# EAGLE board ELYOS_board (EAGLE 9.6.2)
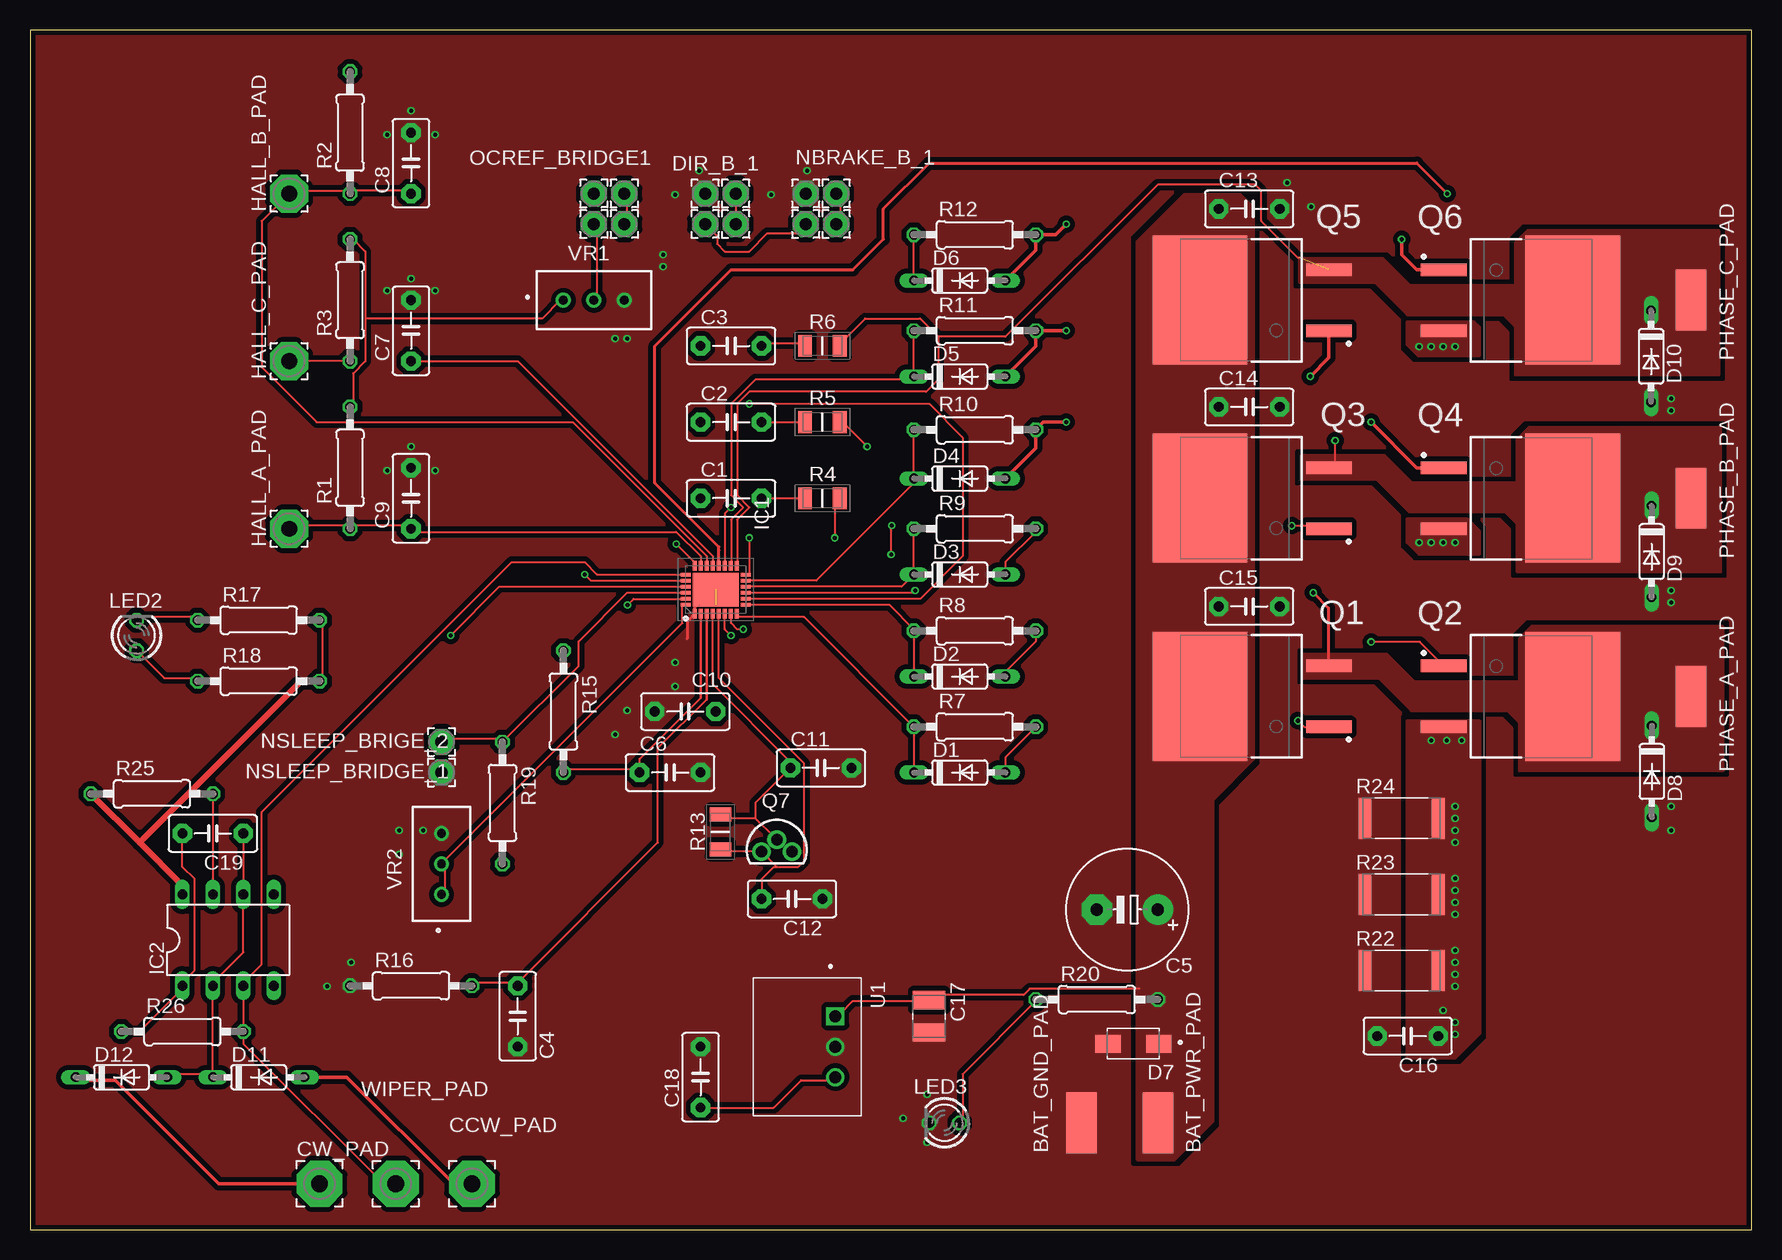
[diagram p0: board, top side]
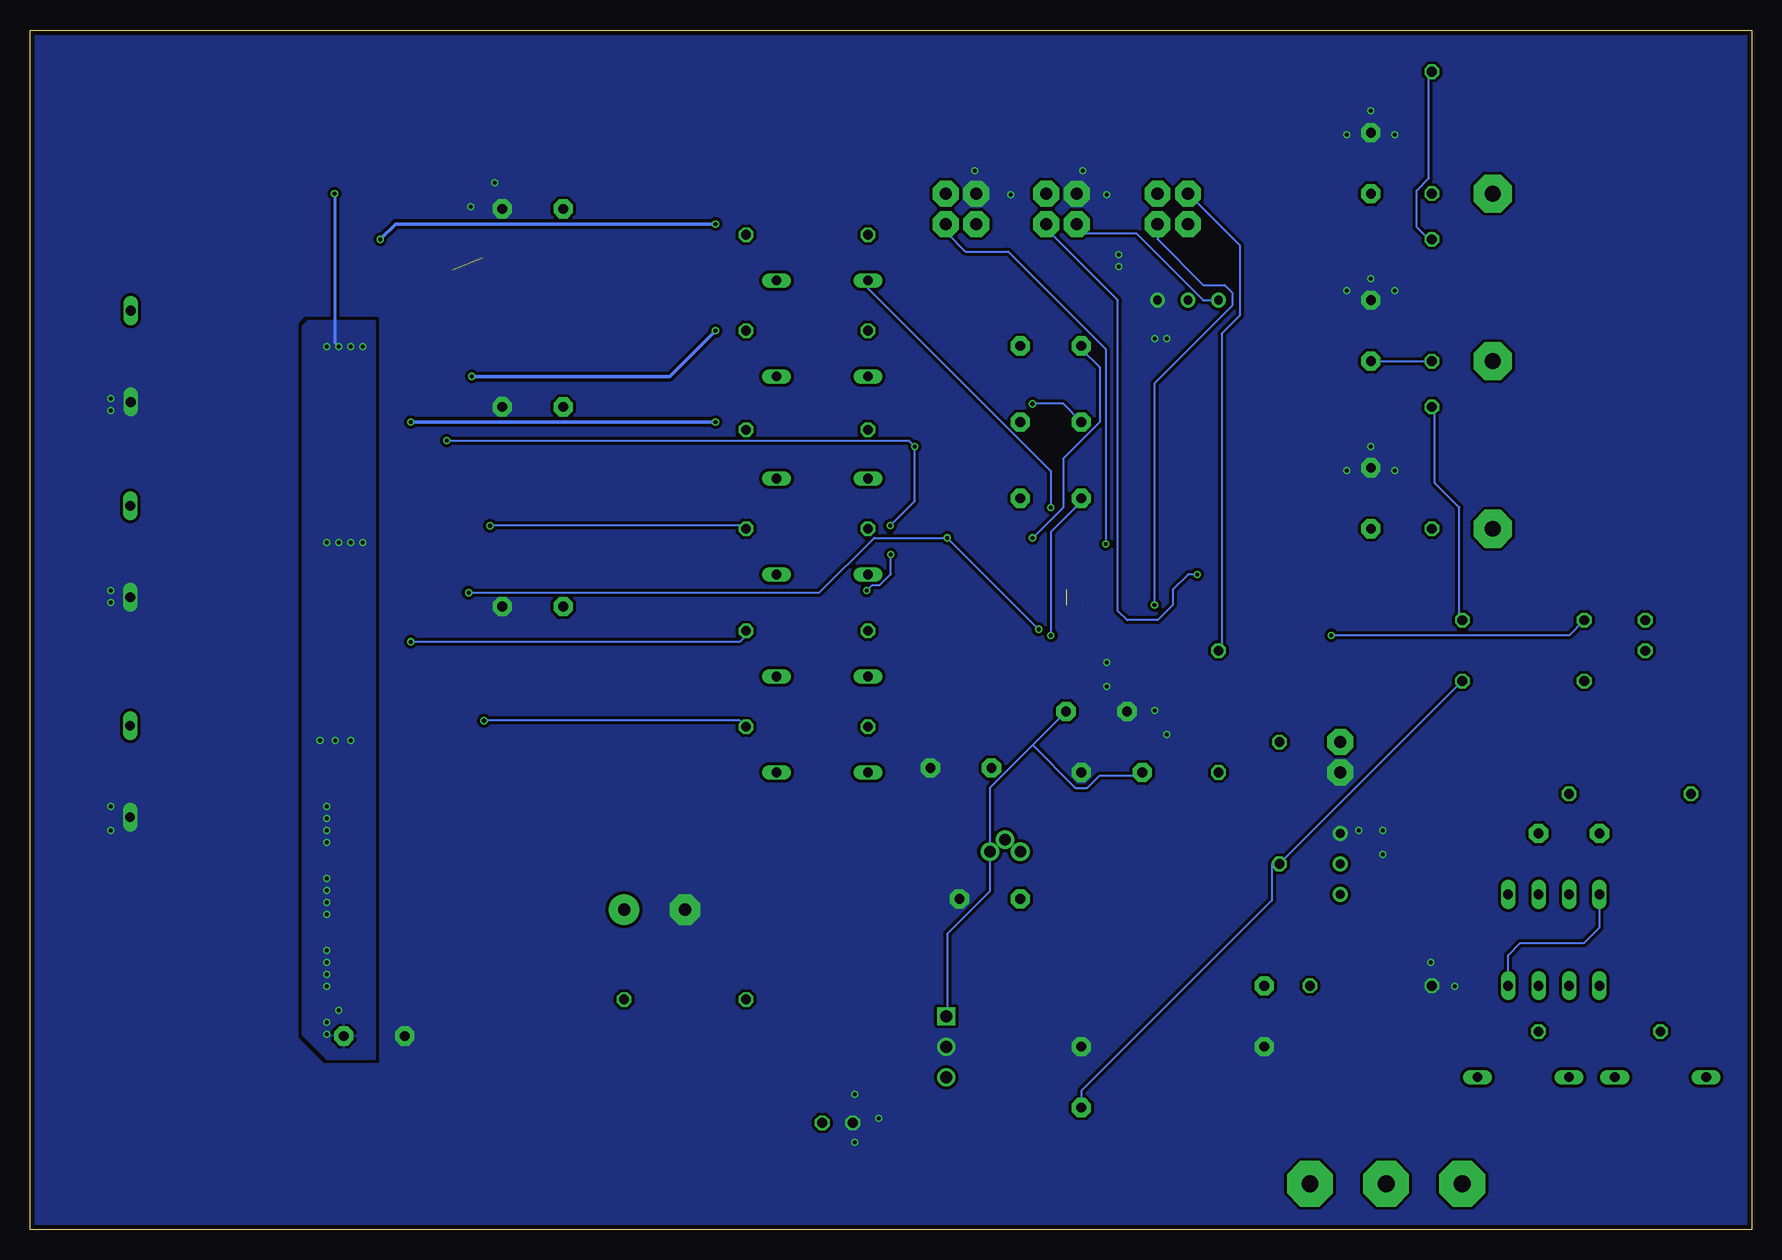
[diagram p1: board, bottom side, seen from below]

Size 143.49 x 100 mm. Coordinates in mm from the lower left corner, seen from the top.
Outline: 0,0 143.49,0 143.49,100 0,100 0,0
Copper layers (1*16): Top 0.035mm / dielectric 1.5mm / Bottom 0.035mm
Design rules "default *": minimum track width 6mil, minimum drill 10mil, track to track 5mil, track to pad 6mil, pad to pad 6mil, via to via 6mil, smd to smd 6mil, copper to edge 15mil, drill to drill 6mil, minimum pad ring 5mil, minimum via ring 5mil, stop-mask expansion 2.5mil, vias tented up to drill 25mil, thermal gap 10mil
Net classes: 0 default: clearance 0.205 mm

## Footprints (pad centres in the part's own frame; a part is rotated, then mirrored left to right if it is on the bottom)
SMD2,54-5,08 = smd 2.54 x 5.08: 1 0,0
C5B3 = drill 0.813 pad 1.6 octagon: 1 -2.54,0; 2 2.54,0
E5-10,5 = drill 1.016 pad 2.54: + -2.54,0 | drill 1.016 pad 2.54 octagon: - 2.54,0
CAPC3225X270N = smd 1.53 x 2.72: 1 -1.341,0; 2 1.341,0
3,81/1,4 = drill 1.397 pad 3.81 octagon: 1 0,0
DO35-7 = drill 0.813 long: A 3.81,0; C -3.81,0
DIOM4325X250N = smd 2.12 x 1.5: A 2.115,0; C -2.115,0
2,15/1,0 = drill 1.016 pad 2.159 octagon: 1 0,0
3,17/1,3 = drill 1.321 pad 3.175 octagon: 1 0,0
QFN50P400X500X100-29N = smd 0.8 x 0.3: 1 -2,1.75; 2 -2,1.25; 3 -2,0.75; 4 -2,0.25; 5 -2,-0.25; 6 -2,-0.75; 7 -2,-1.25; 8 -2,-1.75; 15 2,-1.75; 16 2,-1.25; 17 2,-0.75; 18 2,-0.25; 19 2,0.25; 20 2,0.75; 21 2,1.25; 22 2,1.75 | smd 0.3 x 0.8: 9 -1.25,-2.5; 10 -0.75,-2.5; 11 -0.25,-2.5; 12 0.25,-2.5; 13 0.75,-2.5; 14 1.25,-2.5; 23 1.25,2.5; 24 0.75,2.5; 25 0.25,2.5; 26 -0.25,2.5; 27 -0.75,2.5; 28 -1.25,2.5 | smd 2.8 x 3.8: 29 0,0
DIL-08 = drill 0.813 long: 1 -3.81,-3.81; 2 -1.27,-3.81; 3 1.27,-3.81; 4 3.81,-3.81; 5 3.81,3.81; 6 1.27,3.81; 7 -1.27,3.81; 8 -3.81,3.81
LED3MM = drill 0.813 octagon: A -1.27,0; K 1.27,0
TO254P1524X508-4_3N = smd 3.8 x 1.05: 1 -5.375,2.54; 3 -5.375,-2.54 | smd 7.9 x 10.75: 2 5.375,0
TO-92_FAIRCHILD = drill 0.96 pad 1.56: 1 -1.27,-0.5; 2 0,0.5; 3 1.27,-0.5
0207/10 = drill 0.813 octagon: 1 -5.08,0; 2 5.08,0
RESC3216X65N = smd 1.15 x 1.8: 1 -1.45,0; 2 1.45,0
RESC6332X65N = smd 1.07 x 3.42: 1 -3.055,0; 2 3.055,0
CONV_P7803-500 = drill 1 square: 1 -2.54,2.35 | drill 1: 2 0,2.35; 3 2.54,2.35
3296W-1 = drill 0.74 pad 1.24: 1 -2.54,0; 2 0,0; 3 2.54,0

## Placement (x,y rotation side)
BAT_GND_PAD  [SMD2,54-5,08]  87.63,8.89 0 top
BAT_PWR_PAD  [SMD2,54-5,08]  93.98,8.89 0 top
C1  1uF  [C5B3]  58.42,60.96 0 top
C2  1uF  [C5B3]  58.42,67.31 0 top
C3  1uF  [C5B3]  58.42,73.66 0 top
C4  12nF  [C5B3]  40.64,17.78 270 top
C5  100uF 100v  [E5-10,5]  91.44,26.67 180 top
C6  1uF 100v  [C5B3]  53.34,38.1 0 top
C7  1nF  [C5B3]  31.75,74.93 90 top
C8  1nF  [C5B3]  31.75,88.9 90 top
C9  1nF  [C5B3]  31.75,60.96 90 top
C10  100nF 100v  [C5B3]  54.61,43.18 180 top
C11  1uF 25v  [C5B3]  65.91,38.48 0 top
C12  10uF 25v  [C5B3]  63.5,27.56 180 top
C13  1uF 90v  [C5B3]  101.6,85.09 0 top
C14  1uF 90v  [C5B3]  101.6,68.58 0 top
C15  1uF 90v  [C5B3]  101.6,51.94 0 top
C16  12nF 50v  [C5B3]  114.81,16.13 180 top
C17  GRM32EC72A106KE05K  [CAPC3225X270N]  74.93,17.78 90 top
C18  22uF 10v  [C5B3]  55.88,12.7 90 top
C19  1uF 25v  [C5B3]  15.24,33.02 180 top
CCW_PAD  [3,81/1,4]  36.83,3.81 0 top
CW_PAD  [3,81/1,4]  24.13,3.81 0 top
D1  1N4148DO35-7  [DO35-7]  77.47,38.1 0 top
D2  1N4148DO35-7  [DO35-7]  77.47,46.1 0 top
D3  1N4148DO35-7  [DO35-7]  77.47,54.61 0 top
D4  1N4148DO35-7  [DO35-7]  77.47,62.61 0 top
D5  1N4148DO35-7  [DO35-7]  77.47,71.12 0 top
D6  1N4148DO35-7  [DO35-7]  77.47,79.12 0 top
D7  SMAJ100A  [DIOM4325X250N]  91.95,15.49 180 top
D8  1N4148DO35-7  [DO35-7]  135.15,38.19 270 top
D9  1N4148DO35-7  [DO35-7]  135.13,56.52 270 top
D10  1N4148DO35-7  [DO35-7]  135.08,72.8 270 top
D11  1N4148DO35-7  [DO35-7]  19.05,12.7 0 top
D12  1N4148DO35-7  [DO35-7]  7.62,12.7 0 top
DIR_B_1  [2,15/1,0]  58.8,83.82 0 top
DIR_B_2  [2,15/1,0]  58.8,86.36 0 top
DIR_B_3  [2,15/1,0]  56.26,83.82 0 top
DIR_B_4  [2,15/1,0]  56.26,86.36 0 top
HALL_A_PAD  [3,17/1,3]  21.59,58.42 90 top
HALL_B_PAD  [3,17/1,3]  21.59,86.36 90 top
HALL_C_PAD  [3,17/1,3]  21.59,72.39 90 top
IC1  MP6538GV-Z  [QFN50P400X500X100-29N]  57.15,53.34 90 top
IC2  NE555  [DIL-08]  16.51,24.13 0 top
LED2  TLLG4400  [LED3MM]  8.89,49.53 90 top
LED3  TLLG4400  [LED3MM]  76.2,8.89 180 top
NBRAKE_B_1  [2,15/1,0]  67.18,83.82 0 top
NBRAKE_B_2  [2,15/1,0]  67.18,86.36 0 top
NBRAKE_B_3  [2,15/1,0]  64.64,83.82 0 top
NBRAKE_B_4  [2,15/1,0]  64.64,86.36 0 top
NSLEEP_BRIDGE_1  [2,15/1,0]  34.29,40.64 0 top
NSLEEP_BRIGE_2  [2,15/1,0]  34.29,38.1 0 top
OCREF_BRIDGE1  [2,15/1,0]  46.99,83.82 0 top
OCREF_BRIDGE2  [2,15/1,0]  46.99,86.36 0 top
OCREF_BRIDGE3  [2,15/1,0]  49.53,86.36 0 top
OCREF_BRIDGE4  [2,15/1,0]  49.53,83.82 0 top
PHASE_A_PAD  [SMD2,54-5,08]  138.43,44.45 0 top
PHASE_B_PAD  [SMD2,54-5,08]  138.43,60.96 0 top
PHASE_C_PAD  [SMD2,54-5,08]  138.43,77.47 0 top
Q1  [TO254P1524X508-4_3N]  102.87,44.45 180 top
Q2  [TO254P1524X508-4_3N]  123.19,44.45 0 top
Q3  [TO254P1524X508-4_3N]  102.87,60.96 180 top
Q4  [TO254P1524X508-4_3N]  123.19,60.96 0 top
Q5  [TO254P1524X508-4_3N]  102.87,77.47 180 top
Q6  [TO254P1524X508-4_3N]  123.19,77.47 0 top
Q7  PN2222ABU  [TO-92_FAIRCHILD]  62.23,32 0 top
R1  4.7k  [0207/10]  26.67,63.5 90 top
R2  4.7k  [0207/10]  26.67,91.44 90 top
R3  4.7k  [0207/10]  26.67,77.47 90 top
R4  ESR18EZPJ472  [RESC3216X65N]  66.04,60.96 0 top
R5  ESR18EZPJ472  [RESC3216X65N]  66.04,67.31 0 top
R6  ESR18EZPJ472  [RESC3216X65N]  66.04,73.66 0 top
R7  22  [0207/10]  78.74,41.91 0 top
R8  22  [0207/10]  78.74,49.91 0 top
R9  22  [0207/10]  78.74,58.42 0 top
R10  22  [0207/10]  78.74,66.67 0 top
R11  22  [0207/10]  78.74,74.93 0 top
R12  22  [0207/10]  78.74,82.93 0 top
R13  ESR18EZPJ472  [RESC3216X65N]  57.53,33.15 270 top
R15  100k  [0207/10]  44.45,43.18 270 top
R16  4.7k  [0207/10]  31.75,20.32 0 top
R17  4.7k  [0207/10]  19.05,50.8 0 top
R18  1k  [0207/10]  19.05,45.72 0 top
R19  4.7k  [0207/10]  39.37,35.56 270 top
R20  10k  [0207/10]  88.9,19.18 0 top
R22  CRGCQ2512J330R  [RESC6332X65N]  114.3,21.59 0 top
R23  CRGCQ2512J330R  [RESC6332X65N]  114.3,27.94 0 top
R24  CRGCQ2512J330R  [RESC6332X65N]  114.3,34.29 0 top
R25  1k  [0207/10]  10.16,36.32 0 top
R26  100  [0207/10]  12.7,16.51 0 top
U1  P7803-500  [CONV_P7803-500]  64.77,15.24 270 top
VR1  3296W-1-504LF  [3296W-1]  46.99,77.47 0 top
VR2  3296W-1-504LF  [3296W-1]  34.29,30.48 90 top
WIPER_PAD  [3,81/1,4]  30.48,3.81 0 top

## Library data of the parts
BAT_GND_PAD BAT_PWR_PAD CCW_PAD CW_PAD DIR_B_1-DIR_B_4 HALL_A_PAD HALL_B_PAD HALL_C_PAD NBRAKE_B_1-NBRAKE_B_4 NSLEEP_BRIDGE_1 NSLEEP_BRIGE_2 OCREF_BRIDGE1-OCREF_BRIDGE4 PHASE_A_PAD PHASE_B_PAD PHASE_C_PAD WIPER_PAD = wirepad
C1-C4 C6-C16 C18 C19 = capacitor-wima
C5 = rcl; SPICEPREFIX: C
C17 = GRM32EC72A106KE05K; AVAILABILITY: In Stock; DESCRIPTION: SMD capacitor X7S(EIA) with capacitance 10uF Tol.10%. Rated voltage 100Vdc 125C; MF: Murata Electronics; MP: GRM32EC72A106KE05K; PACKAGE: 3225 Murata; PRICE: None; PURCHASE-URL: https://pricing.snapeda.com/search?q=GRM32EC72A106KE05K&ref=eda
D1-D6 D8-D12 = diode
D7 = SMAJ100A; DESCRIPTION: 162V Clamp 2.5A Ipp Tvs Diode Surface Mount DO-214AC (SMA); DIGI-KEY_PART_NUMBER: SMAJ100ABTR-ND; MF: Bourns; MP: SMAJ100A; PACKAGE: DO-214 Bourns; PURCHASE-URL: https://pricing.snapeda.com/search?q=SMAJ100A&ref=eda
IC1 = MP6538GV-Z; DESCRIPTION: Motor / Motion / Ignition Controllers & Drivers 100V, Three-Phase BLDC Motor Pre-Driver; HEIGHT: 1mm; MANUFACTURER_NAME: Monolithic Power Systems (MPS); MANUFACTURER_PART_NUMBER: MP6538GV-Z; MOUSER_PART_NUMBER: 946-MP6538GV-Z; MOUSER_PRICE-STOCK: https://www.mouser.com/Search/Refine.aspx?Keyword=946-MP6538GV-Z
IC2 = st-microelectronics; MF: Arrow Electronics; MPN: NE555N; OC_FARNELL: 1467742; OC_NEWARK: 89K1486
LED2 LED3 = led; MF: VISHAY SEMICONDUCTOR; OC_FARNELL: 1612435
Q1-Q6 = IRF135S203
Q7 = PN2222ABU; ARROW_PART_NUMBER: PN2222ABU; ARROW_PRICE-STOCK: https://www.arrow.com/en/products/pn2222abu/on-semiconductor?region=nac; DESCRIPTION: Transistor GP BJT NPN 40V 1A TO92 3 Pin; HEIGHT: mm; MANUFACTURER_NAME: onsemi; MANUFACTURER_PART_NUMBER: PN2222ABU; MOUSER_PART_NUMBER: 512-PN2222ABU; MOUSER_PRICE-STOCK: https://www.mouser.co.uk/ProductDetail/onsemi-Fairchild/PN2222ABU?qs=UMEuL5FsraBJOIjLOc%2FtCA%3D%3D
R1-R3 R7-R12 R15-R20 R25 R26 = rcl; SPICEPREFIX: R
R4-R6 R13 = ESR18EZPJ472; DESCRIPTION: Thick Film Resistors - SMD 1206 4K7ohm 5% Anti Surge AEC-Q200; HEIGHT: 0.65mm; MANUFACTURER_NAME: ROHM Semiconductor; MANUFACTURER_PART_NUMBER: ESR18EZPJ472; MOUSER_PART_NUMBER: 755-ESR18EZPJ472; MOUSER_PRICE-STOCK: https://www.mouser.co.uk/ProductDetail/ROHM-Semiconductor/ESR18EZPJ472?qs=DyUWGjl%252BcVslx58QF7i4lw%3D%3D
R22-R24 = CRGCQ2512J330R; COMMENT: 1-2176350-6; DESCRIPTION: Fixed Resistor CRGCQ 2512 330R 5%; DIGI-KEY_PART_NUMBER: A130303TR-ND; MF: TE Connectivity; MP: CRGCQ2512J330R; PACKAGE: 6332 TE Connectivity; PURCHASE-URL: https://pricing.snapeda.com/search?q=CRGCQ2512J330R&ref=eda
U1 = P7803-500; MANUFACTURER: CUI Inc; MAXIMUM_PACKAGE_HEIGHT: 17.5mm; PARTREV: 1.0; SNAPEDA_PN: P7803-500; STANDARD: Manufacturer Recommendations
VR1 VR2 = 3296W-1-504LF; ARROW_PART_NUMBER: 3296W-1-504LF; ARROW_PRICE-STOCK: https://www.arrow.com/en/products/3296w-1-504lf/bourns?region=nac; DESCRIPTION: 500k Through Hole Trimmer Potentiometer 0.5W Top Adjust Bourns 3296 Series; HEIGHT: mm; MANUFACTURER_NAME: Bourns; MANUFACTURER_PART_NUMBER: 3296W-1-504LF; MOUSER_PART_NUMBER: 652-3296W-1-504LF; MOUSER_PRICE-STOCK: https://www.mouser.co.uk/ProductDetail/Bourns/3296W-1-504LF?qs=w1MTx8k0aB61GtweoJ9x6g%3D%3D

## Nets
+3V3: C18.1 DIR_B_3.1 IC2.4 IC2.8 NBRAKE_B_3.1 R1.2 R2.2 R3.2 R17.2 R18.2 R19.2 R25.1 U1.3 VR1.1
BSTA: C1.1 IC1.6
BSTB: C2.1 IC1.10
BSTC: C3.1 IC1.14
CSO: C4.1 IC1.3 R16.2
DIR: DIR_B_1.1 DIR_B_2.1 IC1.24
DT: IC1.28 VR2.1 VR2.2
FAULT: IC1.25 LED2.K R17.1
GHA: D1.C IC1.8 R7.1
GHB: D3.C IC1.12 R9.1
GHC: D5.C IC1.16 R11.1
GLA: D2.C IC1.9 R8.1
GLB: D4.C IC1.13 R10.1
GLC: D6.C IC1.17 R12.1
GND: BAT_GND_PAD.1 C4.2 C5.- C6.2 C7.2 C8.2 C9.2 C10.2 C11.2 C12.1 C13.2 C14.2 C15.2 C16.2 C17.1 C18.2 D7.A D8.A D9.A D10.A DIR_B_4.1 IC1.1 IC1.29 LED3.K NBRAKE_B_4.1 NSLEEP_BRIGE_2.1 R16.1 R22.1 R23.1 R24.1 U1.2 VR1.3 VR2.3
HALL_A: C9.1 HALL_A_PAD.1 IC1.21 R1.1
HALL_B: C8.1 HALL_B_PAD.1 IC1.20 R2.1
HALL_C: C7.1 HALL_C_PAD.1 IC1.19 R3.1
LDO: C11.1 IC1.4 Q7.2 R13.1
LSS: C16.1 IC1.18 Q2.3 Q4.3 Q6.3 R22.2 R23.2 R24.2
N$2: C1.2 R4.1
N$3: C2.2 R5.1
N$4: C19.1 D11.C D12.A IC2.2 IC2.6
N$5: C3.2 R6.1
N$7: CCW_PAD.1 D11.A
N$8: D1.A Q1.1 R7.2
N$10: D6.A Q6.1 R12.2
N$11: OCREF_BRIDGE1.1 VR1.2
N$12: D2.A Q2.1 R8.2
N$13: D3.A Q3.1 R9.2
N$14: D4.A Q4.1 R10.2
N$15: D5.A Q5.1 R11.2
N$18: OCREF_BRIDGE2.1 R15.1
N$19: LED2.A R18.1
N$21: LED3.A R20.1
N$22: CW_PAD.1 D12.C
N$23: C19.2 IC2.1 R26.1
N$24: IC2.7 R25.2
NBRAKE: IC1.22 NBRAKE_B_1.1 NBRAKE_B_2.1
OCREF: IC1.27 OCREF_BRIDGE3.1 OCREF_BRIDGE4.1
PHASEA: D8.C IC1.7 PHASE_A_PAD.1 Q1.3 Q2.2 R4.2
PHASEB: D9.C IC1.11 PHASE_B_PAD.1 Q3.3 Q4.2 R5.2
PHASEC: D10.C IC1.15 PHASE_C_PAD.1 Q5.3 Q6.2 R6.2
PWM: IC1.23 IC2.3 R26.2 WIPER_PAD.1
SLEEP: IC1.26 NSLEEP_BRIDGE_1.1 R19.1
VCC: BAT_PWR_PAD.1 C5.+ C6.1 C10.1 C13.1 C14.1 C15.1 C17.2 D7.C IC1.2 Q1.2 Q3.2 Q5.2 Q7.3 R15.2 R20.2 U1.1
VREG: C12.2 IC1.5 Q7.1 R13.2

## Tracks (layer width: path | path; a pad name or v marks a point on that pad's centre or on a via)
+3V3
  Top 0.152: 27.94,75.95 27.94,81.53 26.92,82.55 R3.2 | 27.94,75.95 27.94,72.39 26.92,71.37 26.92,68.83 R1.2 | NBRAKE_B_3.1 63.88,83.06 61.45,83.06 59.93,81.53 57.91,81.53 57.26,82.19 57.26,82.82 DIR_B_3.1 | 27.94,75.95 42.67,75.95 44.2,77.47 VR1.1 | IC2.8 12.7,28.7 | C18.1 61.98,10.16 64.26,12.45 67.06,12.45 U1.3 | R17.2 24.38,50.55 24.38,45.97 R18.2 23.88,45.47 22.35,45.47
  Top 0.508: 12.7,28.7 9.14,32.26 | 9.14,32.26 R25.1 | 22.35,45.47 9.14,32.26
  Bottom 0.152: R2.2 26.92,96.27 26.92,87.63 27.94,86.61 27.94,83.57 26.92,82.55 R3.2 | VR1.1 45.72,77.47 51.31,83.06 55.5,83.06 DIR_B_3.1 | IC2.4 20.32,22.86 19.3,23.88 13.97,23.88 12.7,25.15 IC2.8 | R18.2 R19.2 40,30.48 40,27.43 55.88,11.56 C18.1 | R1.2 26.42,68.33 26.42,62.23 24.38,60.2 24.38,51.05 R17.2
BSTA  (via drill 0.35)
  Top 0.152: v58.42,49.53 57.91,50.04 57.91,51.05 IC1.6
  Bottom 0.152: v58.42,49.53 58.42,58.17 55.88,60.71 C1.1
BSTB  (via drill 0.35)
  Top 0.152: v59.94,68.83 74.93,68.83 77.72,66.04 77.72,56.13 74.17,52.58 59.94,52.58 IC1.10
  Bottom 0.152: v59.94,68.83 57.4,68.83 C2.1
BSTC  (via drill 0.35)
  Top 0.152: v59.94,57.66 59.94,54.61 IC1.14
  Bottom 0.152: v59.94,57.66 57.4,60.2 57.4,64.26 54.36,67.31 54.36,71.88 55.88,73.41 C3.1
CSO
  Top 0.152: 56.39,44.2 52.32,40.13 52.32,32.26 40.64,20.57 | 56.39,51.05 IC1.3 | 40.64,20.57 37.08,20.57 R16.2 | 40.64,20.57 C4.1
  Top 0.203: 56.39,44.2 56.39,51.05
DIR  (via drill 0.35)
  Top 0.152: v46.23,54.61 46.74,54.1 54.36,54.1 IC1.24 | DIR_B_2.1 DIR_B_1.1
  Bottom 0.152: DIR_B_1.1 58.8,83.44 52.83,77.47 52.83,51.56 52.07,50.8 49.53,50.8 48.26,52.07 48.26,53.34 46.99,54.61 v46.23,54.61
DT
  Top 0.152: IC1.28 54.36,52.07 54.36,50.55 VR2.2 34.54,30.23 34.54,28.19 VR2.1
FAULT  (via drill 0.35)
  Top 0.152: v35.05,49.53 39.12,53.59 54.36,53.59 IC1.25 | LED2.K 9.14,51.05 13.72,51.05 R17.1
  Bottom 0.152: v35.05,49.53 15.24,49.53 R17.1
GHA
  Top 0.152: IC1.8 58.93,51.05 64.52,51.05 R7.1 D1.C
GHB
  Top 0.152: IC1.12 59.94,53.59 72.64,53.59 D3.C R9.1
GHC
  Top 0.152: IC1.16 58.42,55.63 58.42,59.18 59.44,60.2 58.42,61.21 58.42,68.83 60.45,70.87 73.66,70.87 D5.C R11.1
GLA
  Top 0.152: IC1.9 59.94,52.07 71.63,52.07 73.66,50.04 R8.1 D2.C
GLB
  Top 0.152: IC1.13 59.94,54.1 65.53,54.1 73.66,62.23 D4.C R10.1
GLC  (via drill 0.35)
  Top 0.152: v58.42,60.2 57.91,59.69 57.91,55.63 IC1.17 | D6.C R12.1
  Bottom 0.152: v58.42,60.2 58.42,63.25 73.66,78.49 D6.C
GND  (via drill 0.35)  (2 unrouted)
  Top 0.152: 55.76,52.07 57.15,52.07
  Top 0.254: 55.76,52.07 55.61,52.07 55.4,51.86 IC1.1 54.76,50.7 54.76,49.27
  other vias: 48.76,41.27 49.76,43.27 53.76,45.27 53.76,47.27 136.76,35.27 136.76,33.27 136.76,52.27 136.76,53.27 136.76,68.27 136.76,69.27 74.76,11.27 72.76,9.27 74.76,7.27 32.76,33.27 30.76,33.27 30.76,31.27 26.76,22.27 24.76,20.27 33.76,63.27 31.76,65.27 29.76,63.27 33.76,78.27 31.76,79.27 29.76,78.27 33.76,91.27 29.76,91.27 31.76,93.27 49.76,74.27 48.76,74.27 52.76,80.27 52.76,81.27 53.76,86.27 55.76,88.27 64.76,88.27 61.76,86.27 106.76,85.27 104.76,87.27
  pour Top (isolate 0.406, rank 5, no thermals): -1.24,100.27 -1.24,-0.73 144.76,-0.73 144.76,101.27 -1.24,101.27
  pour Bottom (isolate 0.254, rank 5, no thermals): -2.24,102.27 -2.24,-1.73 145.76,-1.73 145.76,102.27
HALL_A
  Top 0.152: IC1.21 55.88,55.63 55.88,56.13 53.85,58.17 32,58.17 C9.1 31.5,58.67 26.92,58.67 R1.1 26.42,58.67 21.84,58.67 HALL_A_PAD.1
HALL_B
  Top 0.152: C8.1 31.5,86.61 26.92,86.61 R2.1 26.42,86.61 21.84,86.61 HALL_B_PAD.1 19.3,84.07 19.3,71.88 23.88,67.31 45.21,67.31 56.39,56.13 56.39,55.63 IC1.20
HALL_C
  Top 0.152: C7.1 40.64,72.39 56.9,56.13 56.9,55.63 IC1.19 | R3.1 HALL_C_PAD.1
  Bottom 0.152: C7.1 R3.1
LDO
  Top 0.152: 60.45,34.29 57.91,34.29 R13.1 | 60.45,34.29 61.98,32.77 Q7.2 | IC1.4 56.9,51.05 56.9,45.47 63.37,38.99 C11.1 60.45,35.56 60.45,34.29
LSS  (via drill 0.35)
  Top 0.254: IC1.18 57.4,56.64 57.4,56.9 52.07,62.23 52.07,73.66 58.42,80.01 68.58,80.01 71.12,82.55 71.12,85.09 74.93,88.9 115.57,88.9 v118.11,86.36
  Bottom 0.254: v118.11,86.36 118.11,73.95 v117.76,73.6
  other vias: 115.76,57.27 116.76,57.27 117.76,57.27 118.76,57.27 118.76,20.27 118.76,21.27 118.76,22.27 118.76,23.27 118.76,16.27 118.76,17.27 117.76,18.27 118.76,26.27 118.76,27.27 118.76,28.27 118.76,29.27 118.76,32.27 118.76,33.27 118.76,34.27 118.76,35.27 119.32,40.77 118.06,40.77 116.77,40.77 115.76,73.6 116.76,73.6 118.76,73.6
  pour Bottom: 114.76,75.67 120.36,75.67 120.76,75.27 120.76,16.27 118.76,14.27 114.76,14.27
  pour Top (isolate 0.406, rank 2, no thermals): 114.76,14.27 114.76,42.42 120.81,42.42 120.81,16.32 118.76,14.27
  pour Top (isolate 0.406, rank 2, no thermals): 115.76,59.27 119.76,59.27 120.76,58.27 120.76,56.27 115.76,56.27 114.76,57.27 114.76,59.27
  pour Top (isolate 0.406, rank 2, no thermals): 114.96,75.7 120.33,75.7 120.76,75.27 120.76,72.8 115.69,72.8 114.76,73.73 114.76,75.68
N$2
  Top 0.152: R4.1 C1.2
N$3
  Top 0.152: C2.2 R5.1
N$4
  Top 0.152: C19.1 IC2.6 17.78,23.11 15.24,20.57 IC2.2 15.24,12.95 | 15.24,12.95 11.68,12.95 D12.A | 15.24,12.95 D11.C
N$5
  Top 0.152: R6.1 64.52,73.91 60.96,73.91 C3.2
N$7
  Top 0.152: 35.31,3.81 CCW_PAD.1
  Top 0.305: D11.A 26.42,12.7 35.31,3.81
N$8  (via drill 0.35)
  Top 0.152: D1.A 81.28,39.37 R7.2 | Q1.1 106.17,41.91 v105.66,42.42
  Bottom 0.152: v105.66,42.42 84.33,42.42 R7.2
N$10  (via drill 0.35)
  Top 0.305: D6.A 83.82,81.66 R12.2 85.47,82.93 v86.36,83.82 | v114.3,82.55 114.3,81.28 115.57,80.01 Q6.1
  Bottom 0.305: v86.36,83.82 113.03,83.82 v114.3,82.55
N$11
  Top 0.152: VR1.2 47.24,77.47 47.24,83.57 OCREF_BRIDGE1.1
N$12  (via drill 0.35)
  Top 0.152: R8.2 83.82,49.02 81.28,46.48 D2.A | Q2.1 115.82,48.99 v111.76,48.99
  Bottom 0.152: v111.76,48.99 84.36,48.99 83.82,49.53 R8.2
N$13  (via drill 0.35)
  Top 0.152: D3.A 81.28,55.63 83.82,58.17 R9.2 | v105.16,58.67 108.2,58.67 Q3.1
  Bottom 0.152: v105.16,58.67 83.82,58.67 R9.2
N$14  (via drill 0.35)
  Top 0.305: D4.A 83.82,65.15 R10.2 84.45,67.31 v86.36,67.31 | v111.76,67.31 115.57,63.5 Q4.1
  Bottom 0.305: v86.36,67.31 v111.76,67.31
N$15  (via drill 0.35)
  Top 0.305: Q5.1 108.25,72.69 v106.68,71.12 | v86.36,74.93 R11.2 83.82,73.66 D5.A
  Bottom 0.305: v106.68,71.12 90.17,71.12 v86.36,74.93
N$18
  Bottom 0.152: OCREF_BRIDGE2.1 42.67,82.04 42.67,76.2 44.2,74.68 44.2,48.51 R15.1
N$19
  Top 0.152: LED2.A 11.18,45.97 13.72,45.97 R18.1
N$21
  Top 0.152: LED3.A 77.72,8.89 77.72,12.95 83.82,19.05 R20.1
N$22
  Top 0.152: 4.06,12.45 D12.C
  Top 0.305: 4.06,12.45 7.11,12.45 15.75,3.81 CW_PAD.1
N$23
  Top 0.152: R26.1 9.14,16.51 12.7,20.07 IC2.1 12.7,20.57 13.72,21.59 13.72,29.21 12.7,30.23 C19.2
N$24
  Top 0.152: R25.2 IC2.7
NBRAKE  (via drill 0.35)
  Top 0.152: v53.85,57.15 55.37,55.63 IC1.22 | NBRAKE_B_2.1 67.56,85.6 67.56,83.57 NBRAKE_B_1.1
  Bottom 0.152: v53.85,57.15 53.85,73.41 61.98,81.53 65.53,81.53 67.06,83.06 NBRAKE_B_1.1
OCREF  (via drill 0.35)
  Top 0.152: v49.78,52.07 50.29,52.58 54.36,52.58 IC1.27 | OCREF_BRIDGE3.1 49.78,86.11 49.78,84.07 OCREF_BRIDGE4.1
  Bottom 0.152: OCREF_BRIDGE4.1 49.53,82.55 45.72,78.74 43.94,78.74 43.31,78.1 43.31,77.01 49.78,70.53 v49.78,52.07
PHASEA  (via drill 0.35)
  Top 0.152: v59.44,50.04 58.93,50.04 58.42,50.55 58.42,51.05 IC1.7 | v67.06,57.66 67.06,60.71 R4.2 | v106.93,53.09 107.06,53.09
  Top 0.254: v106.93,53.09 108.2,51.82 108.2,47.03 Q1.3
  Bottom 0.152: v59.44,50.04 v67.06,57.66 73.15,57.66 77.72,53.09 v106.93,53.09
  pour Top (isolate 0.406, rank 2, no thermals): 106.1,47.93 106.1,46.26 106.09,46.25 106.09,45.97 112.39,45.97 115.1,43.26 123.1,43.26 124.1,42.26 124.1,38.26 141.1,38.26 141.1,50.26 125.1,50.26 124.1,49.26 124.1,45.66 115.38,45.66 113.11,47.93
PHASEB  (via drill 0.35)
  Top 0.152: IC1.11 73.76,53.09 v73.76,53.27 | v71.76,56.27 71.76,58.63 v71.81,58.68 | v69.76,65.27 67.72,67.31 R5.2 | Q3.3 108.77,64.03 v108.77,65.77 v108.76,65.77
  Bottom 0.152: v73.76,53.27 73.31,53.72 72.68,53.72 71.76,54.64 v71.76,56.27 | v71.81,58.68 69.76,60.73 v69.76,65.27 70.26,65.77 v108.76,65.77
  pour Top (isolate 0.406, rank 2, no thermals): 105.9,64.51 105.9,62.84 105.89,62.83 105.89,62.55 112.19,62.55 114.9,59.84 122.9,59.84 123.9,58.84 123.9,54.84 140.9,54.84 140.9,66.84 124.9,66.84 123.9,65.84 123.9,62.24 115.18,62.24 112.91,64.51
PHASEC  (1 unrouted)
  Top 0.152: 75.69,74.42 75.69,70.87 74.68,69.85 59.94,69.85 58.93,68.83 58.93,61.21 59.94,60.2 58.93,59.18 58.93,55.63 IC1.15 | 75.69,74.42 74.17,75.95 69.6,75.95 67.56,73.91 R6.2 | 75.69,74.42 81.28,74.42 93.98,87.12 102.11,87.12 102.62,86.61 102.62,84.07 105.66,81.03 105.79,81.03
  pour Top (isolate 0.406, rank 2, no thermals): 105.76,80.94 105.76,79.27 105.75,79.26 105.75,78.98 112.05,78.98 114.76,76.27 122.76,76.27 123.76,75.27 123.76,71.27 140.76,71.27 140.76,83.27 124.76,83.27 123.76,82.27 123.76,78.67 115.04,78.67 112.77,80.94
PWM
  Top 0.152: IC1.23 54.36,54.61 47.24,54.61 46.23,55.63 40.13,55.63 19.3,34.8 19.3,22.1 17.78,20.57 IC2.3 R26.2 17.78,15.49 29.46,3.81 WIPER_PAD.1
SLEEP
  Top 0.152: IC1.26 54.36,53.09 49.78,53.09 45.72,49.02 45.72,46.99 R19.1 39.12,40.89 34.54,40.89 NSLEEP_BRIDGE_1.1
VCC
  Top 0.152: 55.88,44.32 50.8,39.24 50.8,38.35 | 55.88,51.05 IC1.2 | 50.8,38.35 44.7,38.35 R15.2 | 50.8,38.35 C6.1 | U1.1 67.56,18.03 68.58,19.05 74.68,19.05 C17.2 75.18,19.56 82.8,19.56 83.31,20.07 92.46,20.07
  Top 0.203: 55.88,44.32 55.88,51.05
  Bottom 0.152: C10.1 59.94,40.39 | 59.94,40.39 63.5,36.83 Q7.3 63.5,28.19 67.06,24.64 67.06,18.03 U1.1 | 59.94,40.39 56.39,36.83 55.37,36.83 54.36,37.85 50.8,37.85 C6.1
  pour Top (isolate 0.01, rank 2, no thermals): 93.01,83.24 96.19,86.41 100.84,86.41 102.01,85.24 102.01,78.46 102.01,39.17 98.63,35.79 98.63,8.97 95.35,5.69 92.3,5.69 92.18,5.82 92.18,82.4
VREG
  Top 0.152: 62.23,30.23 61.98,30.23 60.96,29.21 C12.2 | 62.23,30.23 64.01,30.23 64.52,30.73 64.52,38.86 57.4,45.97 57.4,51.05 IC1.5 | 62.23,30.23 Q7.1 57.72,31.5 R13.2